# Altium PCB radio_v1.PcbDoc
Units mil, origin at the board's own origin, x right, y up, seen from the top; angles counter-clockwise.
Board outline 1155 x 550 mil, 2 copper layers (Top Layer, Bottom Layer); 45 components, 51 nets, 168 pads, 40 vias.
Unrouted connection lines stored in the file: 1.
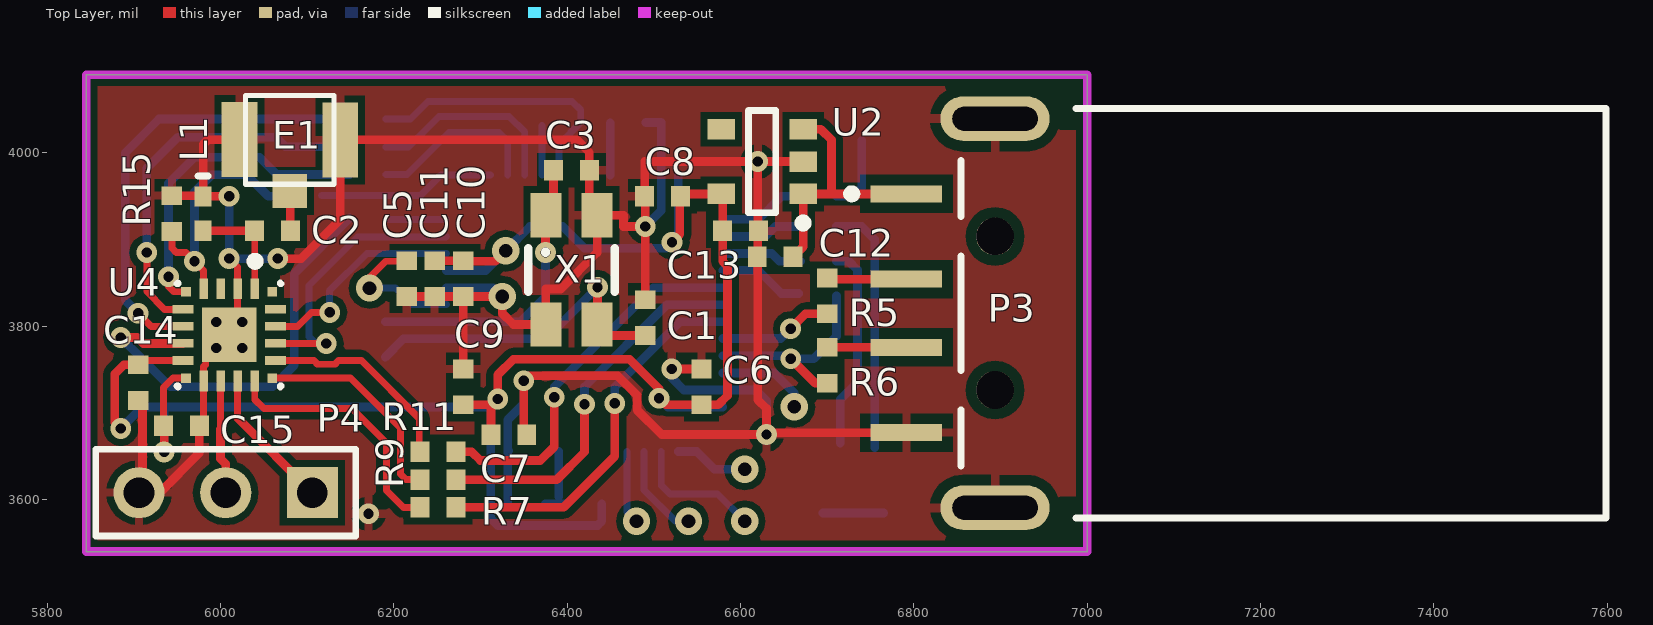
[diagram p0: Top Layer view]
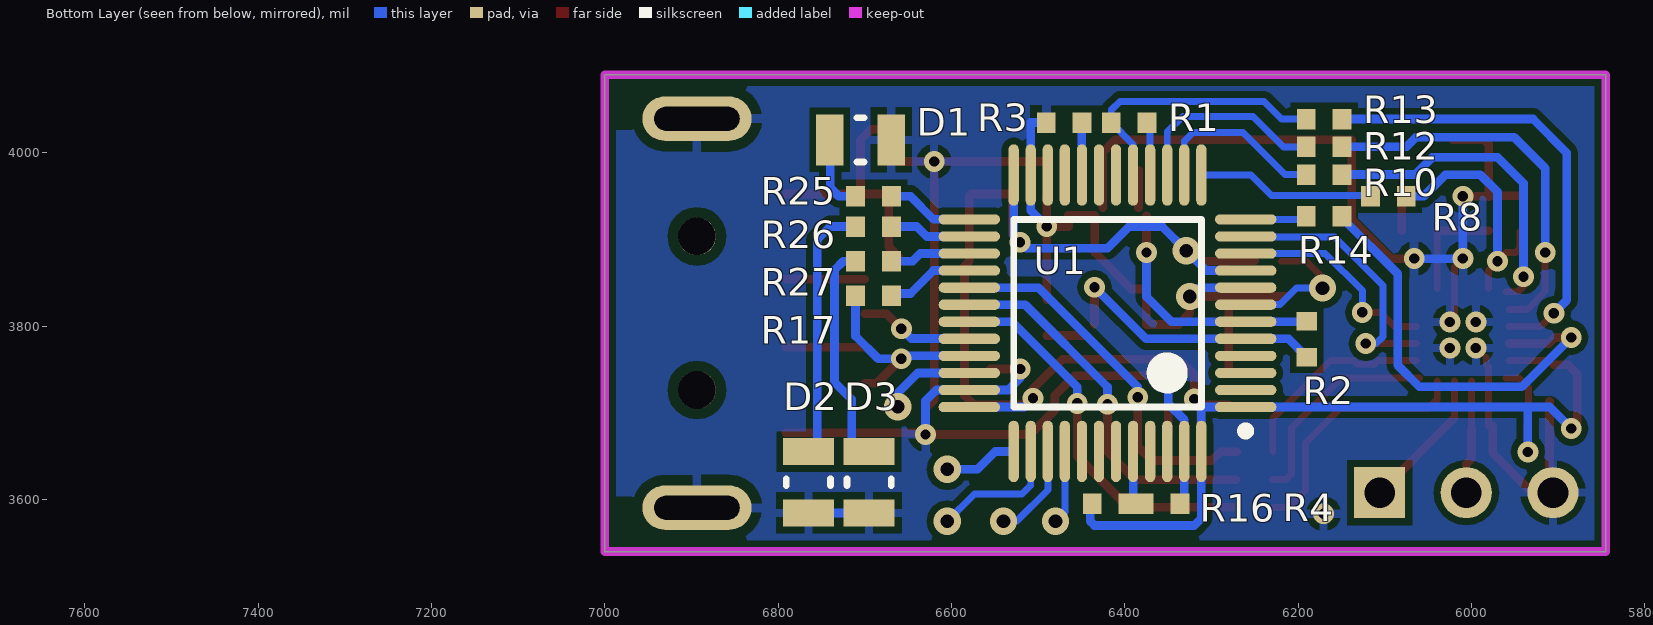
[diagram p1: Bottom Layer view, seen from below]

## Layer stack, top to bottom
Top Layer: signal copper 1.4
Dielectric: dielectric 12.6, FR-4, Dk 4.8
Bottom Layer: signal copper 1.4

## Board outline
5845,3540 5845,4090 7000,4090 7000,3540

## Design rules (kind name [scope] priority, off if disabled: settings)
Clearance ClearanceForUSB [InPolygon vs InComponent('P3')] p1: gap=12
Clearance [All] p2: gap=7.87
ComponentClearance [All] p1: gap=6 collisioncheckmode=3 verticalgap=6 showdistances=FALSE
HoleToHoleClearance [All] p1: gap=5.12 allowstackedmicrovias=TRUE
MinimumSolderMaskSliver [All] p1: minsoldermaskwidth=3.94
PolygonConnect [All] p1: connectstyle=Relief reliefconductorwidth=10 reliefentries=4 polygonreliefangle="90 Angle"
RoutingVias [All] p1: holewidth=11.81 width=23 viastyle="Through Hole" minholewidth=11.81 minwidth=23 maxholewidth=250 maxwidth=262
SilkToSilkClearance [All] p1: silktosilkclearance=6.2
SilkscreenOverComponentPads [All] p1: minsilkscreentomaskgap=6
SolderMaskExpansion [All] p1: expansion=3.94
Width [All] p1: maxlimit=10 minlimit=6 preferedwidth=8 minimp=50.000000 maximp=50.000000 favimp=50.000000
23 further rules are at their usual default settings.

## Classes and differential pairs
component class core: C1 C3 C5 C6 C7 C8 C9 C10 C11 D1 D2 D3 R1 R2 R3 R4 R16 R25 R26 R27 U1 X1
component class hole_field_direct: C2 C14 C15 E1 L1 P4 R7 R8 R9 R10 R11 R12 R13 R14 R15 U4
component class usb_connector: C12 C13 P3 R5 R6 R17 U2

## Components (designator, comment, footprint, x,y, rotation, side; value= is the part's Value field where it differs from the comment)
C1 "27pF" CHIP0402 6490,3810 r270 top
C2 "1nF" CHIP0402 6060,3910 r180 top
C3 "27pF" CHIP0402 6405,3980 r0 top
C5 "100nF" CHIP0402 6215,3855 r270 top
C6 "100nF" CHIP0402 6555,3730 r90 top
C7 "100nF" CHIP0402 6332.73,3675 r0 top
C8 "100nF" CHIP0402 6510,3950 r180 top
C9 "100nF" CHIP0402 6280,3730 r90 top
C10 "100nF" CHIP0402 6280,3855 r90 top
C11 "1uF" CHIP0402 6247,3855 r90 top
C12 "Cap" CHIP0402 6640,3880 r180 top
C13 "Cap" CHIP0402 6600,3910 r0 top
C14 "100nF" CHIP0402 5905,3735 r90 top
C15 "22nF" CHIP0402 5955,3685 r0 top
D1 "LED" LEDC2015X11L 6705,4015 r180 bottom
D2 "LED" LEDC2015X11L 6765,3620 r270 bottom
D3 "LED" LEDC2015X11L 6695,3620 r270 bottom
E1 "IPX_Antenna" IPX-M 6080,4015 r270 top
L1 "56nH" 0402-A 5980,3930 r270 top
P3 "1470695-2" 1470695A 7000,3815 r0 top locked
P4 "Header 3" HDR1X3 6106,3608 r180 top
R1 "47k" CHIP0402 6395,4035 r180 bottom
R2 "1M" CHIP0402 6190,3785 r90 bottom
R3 "47k" CHIP0402 6470,4035 r0 bottom
R4 "47k" CHIP0402 6357,3595 r180 bottom
R5 "22" CHIP0402 6700,3835 r270 top
R6 "22" CHIP0402 6700,3755 r270 top
R7 "600" CHIP0402 6251,3591 r180 top
R8 "2k" CHIP0402 6096,3950 r0 bottom
R9 "2k" CHIP0402 6251,3623 r180 top
R10 "2k" CHIP0402 6170,3975 r0 bottom
R11 "2k" CHIP0402 6251,3655 r180 top
R12 "2k" CHIP0402 6170,4007 r0 bottom
R13 "2k" CHIP0402 6170,4039 r0 bottom
R14 "2k" CHIP0402 6170,3927 r0 bottom
R15 "47k" CHIP0402 5944,3930 r90 top
R16 "47k" CHIP0402 6416.92,3595.01 r180 bottom
R17 "1.5K" CHIP0402 6690,3835 r0 bottom
R25 "56" CHIP0402 6690,3950 r180 bottom
R26 "56" CHIP0402 6690,3915 r0 bottom
R27 "56" CHIP0402 6690,3875 r0 bottom
U1 "STM32F103C8T6" LQFP48_N 6420,3815 r0 bottom locked
U2 "ADP120" SOT95P280X110-5L 6625,3990 r180 top locked
U4 "Si4705" QFN50P300X300X60-20N 6010,3790 r270 top
X1 "8 Mhz" SMD0635x11mm 6405,3865 r270 top locked

## Footprints (in the part's own frame and the unit in brackets; to place one, negate y for a bottom-side part, rotate by r counter-clockwise, add the part's x,y. Pads: shape width x height; smd on the part's side, far side on the other; paste and mask are expansions set on the pad)
0402-A [mm] "Chip Inductor, Body 1.0x0.5mm, IPC High Density"
  rect 0.6x0.5 smd: 1(-0.5,0) 2(0.5,0)
  silkscreen extent -1.1,-0.15 -1.1,0.15, body extent -0.55,-0.3 0.55,0.3, height 0.55
1470695A [mm] "Connector; USB1.1, Type A, SM; 4 Position; Right Angle"
  rect 2.1x0.5 smd: 1(-5.3,3.5) 2(-5.3,1) 3(-5.3,-1) 4(-5.3,-3.5)
  oval 3.2x1.3 hole 0.7 slot 2.5 at 0 deg: 5(-2.7,-5.7) 6(-2.7,5.7)
  round 1.1 hole 1.1 unplated paste+0 mask+0: MH1(-2.7,-2.25) MH2(-2.7,2.25)
  silkscreen extent -7.02,-6 15.2,6
CHIP0402 [mm] "Chip Resistor, 2-Leads, Body 1,0x0,5mm, IPC High Density"
  rect 0.55x0.6 smd: 1(0.525,0) 2(-0.525,0)
  body extent -0.5,-0.25 0.5,0.25, height 0.35
HDR1X3 [mm] "Connector; Header; 3 Position"
  rect 1.5x1.5 hole 0.9: 1(0,0)
  round 1.5 hole 0.9: 2(2.54,0) 3(5.08,0)
  silkscreen extent -1.27,-1.27 6.35,1.27
IPX-M [mm] "A microminiature RF coaxial connector"
  rect 1x1 smd: 1(1.5,0)
  rect 2.2x1.05 smd: 2(0,1.478) 3(-0.007,-1.478)
  silkscreen extent -1.3,-1.3 1.3,1.3, body extent -1.55,-1.36 1.55,1.36, height 1.34
LEDC2015X11L [mm] "Chip Led, 2-Leads, Body 2,0x1,5mm, IPC High Density"
  rect 0.8x1.5 smd: 1(-0.9,0) 2(0.9,0)
  silkscreen extent -0.1,-0.65 0.1,0.65, body extent -1,-0.75 1,0.75, height 1.1
LQFP48_N [mm] "Thin QFP, 48-Leads, Body 7x7mm, Pitch 0.5mm, IPC Medium Density"
  oval 1.8x0.3 smd: 1(-4.05,2.75) 2(-4.05,2.25) 3(-4.05,1.75) 4(-4.05,1.25) 5(-4.05,0.75) 6(-4.05,0.25) 7(-4.05,-0.25) 8(-4.05,-0.75) 9(-4.05,-1.25) 10(-4.05,-1.75) 11(-4.05,-2.25) 12(-4.05,-2.75) 25(4.05,-2.75) 26(4.05,-2.25) 27(4.05,-1.75) 28(4.05,-1.25) 29(4.05,-0.75) 30(4.05,-0.25) 31(4.05,0.25) 32(4.05,0.75) 33(4.05,1.25) 34(4.05,1.75) 35(4.05,2.25) 36(4.05,2.75)
  oval 0.3x1.8 smd: 13(-2.75,-4.05) 14(-2.25,-4.05) 15(-1.75,-4.05) 16(-1.25,-4.05) 17(-0.75,-4.05) 18(-0.25,-4.05) 19(0.25,-4.05) 20(0.75,-4.05) 21(1.25,-4.05) 22(1.75,-4.05) 23(2.25,-4.05) 24(2.75,-4.05) 37(2.75,4.05) 38(2.25,4.05) 39(1.75,4.05) 40(1.25,4.05) 41(0.75,4.05) 42(0.25,4.05) 43(-0.25,4.05) 44(-0.75,4.05) 45(-1.25,4.05) 46(-1.75,4.05) 47(-2.25,4.05) 48(-2.75,4.05)
  silkscreen extent -4.17,-2.75 2.75,3.57, body extent -3.5,-3.5 3.5,3.5, height 1.6
QFN50P300X300X60-20N [mm] "QFN, 20-Leads, Body 3,0x3,0mm (max), Pitch 0,50mm, IPC Medium Density"
  rect 1.6x1.6 smd: 0(0,0)
  rect 0.28x0.28 smd: 1(-1.265,1.265) 6(-1.265,-1.265) 11(1.265,-1.265) 16(1.265,1.265)
  rect 0.61x0.25 smd: 2(-1.355,0.75) 3(-1.355,0.25) 4(-1.355,-0.25) 5(-1.355,-0.75) 12(1.355,-0.75) 13(1.355,-0.25) 14(1.355,0.25) 15(1.355,0.75)
  rect 0.25x0.61 smd: 7(-0.75,-1.355) 8(-0.25,-1.355) 9(0.25,-1.355) 10(0.75,-1.355) 17(0.75,1.355) 18(0.25,1.355) 19(-0.25,1.355) 20(-0.75,1.355)
  silkscreen extent -2.28,-1.52 1.52,1.53, body extent -1.5,-1.5 1.5,1.5, height 0.6
SMD0635x11mm [mm] "SMD CRYSTAL UNITS 6*3.5*1.1mm"
  rect 1.3x0.9 smd: 1(-1.6,-0.75) 2(1.6,-0.75) 3(1.6,0.75) 4(-1.6,0.75)
  silkscreen extent -0.64,-1.27 0.64,1.27
SOT95P280X110-5L [mm] "SOT23, 5-Leads, Body 3,0x2,8mm (max), Pitch 0,95mm, IPC High Density"
  rect 0.8x0.6 smd: 1(-1.2,0.95) 2(-1.2,0) 3(-1.2,-0.95) 4(1.2,-0.95) 5(1.2,0.95)
  silkscreen extent -1.33,-1.5 0.4,1.92, body extent -0.85,-1.5 0.85,1.5, height 1.1

## Part data
C1 C2 C3 C5 C6 C7 C8 C9 C10 C11 C14 C15: library part Cap, "Capacitor"
C12 C13: "Capacitor"
D1 D2 D3: "Typical RED, GREEN, YELLOW, AMBER GaAs LED"
L1: library part Inductor, "Inductor"
P3: "USB 1.1, Right Angle, SMT, A Type, Plug, 4 Position, Natural"
P4: "Header, 3-Pin"
R1 R2 R3 R4 R5 R6 R7 R8 R9 R10 R11 R12 R13 R14 R15 R16 R17 R25 R26 R27: library part Res1, "Resistor"
U1: "STM32 ARM-based 32-bit MCU with 64 Kbytes Flash, 48-pin LQFP, Industrial Temperature"
X1: library part SMD4025-8.000, "Crystal"

## Via types
v1: diameter 24, hole 11.81, Top Layer to Bottom Layer, tented both sides, 28 vias
v2: diameter 31.5, hole 15.75, Top Layer to Bottom Layer, tented bottom, 8 vias
v3: diameter 24, hole 11.81, Top Layer to Bottom Layer, tented bottom, 4 vias

## Nets (pads, with @x,y where several pads share a name; then routed paths per layer and width w, separated by ;. In a path a pad name is that pad's centre, name@x,y a point inside that pad or via, vN(x,y) a via of type N, cw(c..) or ccw(c..) an arc to the next point about the centre after c; other vN are vias at no path point)
+3.3V: C6.2 C7.2 C8.2 C9.2 C10.1 C11.1 C13.2 C14.1 C15.2 R16.2 U1.1 U1.9 U1.24 U1.36 U1.48 U2.5 U4.10 U4.11 | length 2303.3
  Top Layer w8: C14.1@5909.8,3760.47 U4.10 ; C15.2 5934.33,3729.33 5945.2,3740.2 U4.11
  Top Layer w10: v1(5885,3682) 5878,3689 5878,3745 5888.67,3755.67 C14.1 ; v1(5935,3655) C15.2@5935,3684.33 ; C11.1@6250,3875.67 C10.1 ; C9.2 6313.33,3709.33 6312.06,3708.06 C7.2 ; C10.1@6280.67,3875 6317,3875 v2(6329,3887) ; v1(6320,3716) 6320,3744 6338,3762 6472,3762 6506,3728 v1(6506,3717) 6513.67,3709.33 C6.2 6574.33,3709.33 6585,3720 6585,3869.33 6579.33,3875 C13.2@6579.33,3905 ; v1(6521,3897) 6530,3906 6530,3949.33 6533.27,3952.6 U2.5 ; C13.2 U2.5@6579.33,3951.02
  Bottom Layer w10: v1(5885,3682) 5909.73,3706.73 5935,3706.73 ; v1(5935,3655) 5935,3706.73 ; U1.9 6306.21,3864.21 v2(6329,3887) 6357,3915 6395,3915 6420,3890 6514,3890 v1(6521,3897) 6528.27,3904.27 U1.24 ; v1(6320,3716) v1@6311.73,3707.73 ; R16.2@6440,3595 6440,3575 6435,3570 6320,3570 6311.73,3578.27 U1.48 v1@6311.73,3707.73 ; v1(6506,3717) 6516.27,3706.73 U1.36 ; 5935,3706.73 U1.1 6310.73,3706.73 v1@6311.73,3707.73
+5V: C12.2 P3.1 U2.1 U2.3 | length 296.9
  Top Layer w10: C12.2 6672.24,3891.57 U2.1 6791.14,3952.6 P3.1 ; U2.3 6692.6,4027.4 6705,4015 6705,3952.6
BOOT0: R4.2 R16.1 U1.44 | length 76
  Bottom Layer w10: R4.2@6375,3595 R16.1@6398.66,3595 ; R16.1@6390.47,3603.19 U1.44
BOOT1: R3.2 U1.20 | length 60.4
  Bottom Layer w10: U1.20 R3.2@6449.53,4034.8
C_AUX1: U1.45
C_AUX2: U1.46
C_AUX3: U1.21
C_AUX4: U1.22
C_RF_DCLK: R11.2 U1.29 | length 436
  Top Layer w10: R11.2@6270.67,3655 6290,3655 6300,3645 6369,3645 6385,3661 v1(6385,3718)
  Bottom Layer w10: v1(6385,3718) 6385,3730 6499.53,3844.53 U1.29
C_RF_DFS: R9.2 U1.30 | length 435.3
  Top Layer w10: R9.2 6388,3623 6420,3655 v1(6420,3710)
  Bottom Layer w10: v1(6420,3710) 6420,3730 6514.84,3824.84 U1.30
C_RF_DOUT: R7.2 U1.31 | length 444.3
  Top Layer w10: R7.2 6396,3591 6455,3650 v1(6455,3711)
  Bottom Layer w10: v1@6455,3710 6455,3730 6530.16,3805.16 U1.31
C_RF_GPO1: U1.10 U4.19 | length 246.7
  Top Layer w8: U4.19 6088.84,3799.84 6105,3816 v1(6126,3816)
  Bottom Layer w8: v1(6126,3816) 6126,3841 6168.9,3883.9 U1.10
C_RF_GPO2: U1.11 U4.18 | length 298.9
  Top Layer w8: U4.18 6110,3780.16
  Bottom Layer w8: v1@6110,3780 6102.13,3787.87 6102.13,3847.13 6158.19,3903.19 6260.16,3903.19 U1.11
  other v1: 6122,3780
C_RF_RCLK: R14.1 U1.12 | length 68.1
  Bottom Layer w8: R14.1@6192.4,3923.27 U1.12
C_RF_RESET: R8.1 U1.13 | length 204.8
  Bottom Layer w8: R8.1@6116.67,3951 6231,3951 6254.45,3974.45 U1.13
C_RF_SCLK: R12.1 U1.15 | length 231.9
  Bottom Layer w8: R12.1 6217,4007 6252,4042 6333,4042 6351.1,4023.9 U1.15
C_RF_SDIO: R1.2 R13.1 U1.17 | length 322.9
  Bottom Layer w8: R13.1 6219,4039 6239.33,4059.33 6405.67,4059.33 6415.67,4049.33 R1.2 6390.47,4009.8 U1.17
C_RF_SS: R10.1 U1.14 | length 204.1
  Bottom Layer w8: R10.1 6215,3975 6263.58,4023.58 6321.42,4023.58 6331.42,4013.58 U1.14
GND: C1.2 C3.1 C5.1 C6.1 C7.1 C8.1 C9.1 C10.2 C11.2 C12.1 C13.1 C14.2 C15.1 D1.2 D2.2 D3.2 E1.2 E1.3 L1.1 P3.4 P3.5 P3.6 P4.3 R3.1 R4.1 R15.1 U1.8 U1.23 U1.35 U1.47 U2.2 U4.0 U4.3 U4.4 U4.12 X1.2 X1.4 | length 3569.1
  Top Layer w8: P4.3@5905,3608 P4.3@5930,3608 ; C15.1@5980.47,3685 5980.47,3753.47 5983,3756 U4.0@5983,3764 ; v1(6010,3878) 6019.84,3868.16 U4.3 U4.0@6019.84,3799.84
  Top Layer w10: P4.3@5910,3608 C14.2@5910,3713.33 ; P4.3@5930,3608 5975.67,3653.67 C15.1 ; R15.1 L1.1@5979.02,3950.67 ; L1.1 5980,4010 5985.27,4015.27 E1.3 ; L1.1@5980.32,3950 v1(6010,3950) ; v1(6066,3878) 6093,3878 6138.19,3923.19 E1.2 6411,4015 6425.67,4000.33 C3.1 X1.4@6425.67,3936.85 ; C5.1 C11.2 C10.2 ; C9.1 C10.2 ; C7.1@6350,3675.67 v1(6350,3737) 6356,3743 6458.18,3743 6481,3720.18 6481,3703 6509,3675 v1(6630,3675) ; C8.1 6489.33,3990 U2.2 ; C1.2 v1(6490,3915) ; C8.1@6490,3949.33 v1(6490,3915) ; v1(6520.67,3750.67) C6.1 ; v1(6620,3990) 6620,3715 6630,3705 v1(6630,3675) ; v1@6630,3677.2 P3.4 ; v1@6632.2,3677.2 v1(6630,3675) ; C10.2 v2(6325,3834.33) 6325,3815 6337.99,3802.01 X1.2 6375.47,3843 6392.53,3843 6434.53,3885 X1.4 6465,3927.99 6465,3915 v1(6490,3915)
  Bottom Layer w10: v1(6010,3950) v1(6010,3878) v1(6066,3878) ; U1.8 6314.8,3844.53 v2(6325,3834.33) ; R4.1@6331.42,3595 U1.47 ; U1.47@6332.32,3656.46 U1.47 ; v1(6350,3737) 6350,3710.53 6331.42,3691.95 U1.47 ; v1(6490,3915) 6508.58,3933.58 U1.23 6508.58,4035 R3.1 ; v1@6520,3750 6520,3741 6534.58,3726.42 U1.35 6617.62,3726.42 6630,3714.04 v1(6630,3675) ; D3.2 D2.2
  other v1: 6170.67,3583.67
  other v3: 5995,3775 6025,3775 5995,3805 6025,3805
NetC2_1: C2.1 L1.2 U4.2 | length 125.8
  Top Layer w8: U4.2 C2.1@6039.53,3909.8
  Top Layer w10: L1.2@5980,3910 C2.1
NetC2_2: C2.2 E1.1 | length 45.3
  Top Layer w10: C2.2 E1.1@6080.67,3955.28
NetD1_1: D1.1 R25.2 | length 88
  Bottom Layer w10: R25.2 6730,3950 6740,3960 D1.1@6740,4014.57
NetD2_1: D2.1 R26.1 | length 290.5
  Bottom Layer w10: R26.1 6740,3915 6755,3900 D2.1@6755,3660
NetD3_1: D3.1 R27.1 | length 236.8
  Bottom Layer w10: R27.1 6725,3875 6735,3865 6735,3735.43 6715,3715.43 D3.1@6715,3665
NetP3_2: P3.2 R5.2 | length 91.3
  Top Layer w10: R5.2@6700,3854.37 P3.2
NetP3_3: P3.3 R6.2 | length 91.3
  Top Layer w10: R6.2@6700,3775.63 P3.3
NetP4_1: P4.1 U4.14 | length 183.3
  Top Layer w8: 6019.84,3694.16 U4.14
  Top Layer w10: 6019.84,3694.16 P4.1 P4.1@6087,3608
NetP4_2: P4.2 U4.13 | length 157.3
  Top Layer w8: 6000.16,3654.84 U4.13
  Top Layer w10: 6000,3681 6000,3647 6006,3641 P4.2
NetR1_1: R1.1 U1.16 | length 57
  Bottom Layer w8: U1.16 R1.1@6370.79,4031.46
NetR7_1: R7.1 U4.15 | length 295.8
  Top Layer w8: U4.15 6039.53,3715.47 6050,3705 6152,3705 6191.76,3665.24 6191.76,3610.24 6211,3591 R7.1
NetR9_1: R9.1 U4.16 | length 250.1
  Top Layer w8: U4.16 6149.8,3740.2 6207.63,3682.37 6207.63,3629.37 6214,3623 R9.1
NetR10_2: R10.2 U4.6 | length 371.8
  Top Layer w8: v1(5940,3857) 5940,3846 5946.2,3839.8 U4.6
  Bottom Layer w10: v1(5940,3857) 5940,3965 5970,3995 6045,3995 6065,3975 R10.2
NetR11_1: R11.1 U4.17 | length 235.9
  Top Layer w8: U4.17 6107.76,3760.47 6112.11,3756.13 6131.89,3756.13 6136.24,3760.47 6162.53,3760.47 6229.33,3693.67 R11.1@6229.33,3655
NetR12_2: R12.2 U4.7 | length 446.2
  Top Layer w8: v1(5915,3885) 5915,3840 5935.47,3819.53 U4.7
  Bottom Layer w10: v1(5915,3885) 5915,3982.43 5950.57,4018 6064,4018 6075,4007 R12.2
NetR13_2: R13.2 U4.8 | length 524.5
  Top Layer w8: v1(5905,3815) 5920.16,3799.84 U4.8
  Bottom Layer w10: v1(5905,3815) 5890,3830 5890,3999.85 5929.15,4039 R13.2
NetR14_2: R14.2 U4.9 | length 505.1
  Top Layer w10: v1(5885,3787) 5904,3787 5910.84,3780.16 U4.9
  Bottom Layer w10: v1(5885,3787) 5942,3730 6060,3730 6085,3755 6085,3860.67 R14.2@6149.33,3925
NetR25_1: R25.1 U1.25 | length 101
  Bottom Layer w10: U1.25 6620.64,3923.27 6647.37,3950 R25.1
NetR26_2: R26.2 U1.26 | length 94.6
  Bottom Layer w10: U1.26 6628.58,3903.58 6640,3915 R26.2
NetR27_2: R27.2 U1.27 | length 93.6
  Bottom Layer w10: U1.27 6636.1,3883.9 6645,3875 R27.2
OSC_IN: C1.1 R2.2 U1.5 X1.3 | length 363.7
  Top Layer w10: X1.3@6435,3802.48 v1(6435,3845) ; X1.3@6447.2,3789.33 C1.1
  Bottom Layer w10: R2.2 6211.14,3785.47 U1.5 6375.47,3785.47 v1(6435,3845)
OSC_OUT: C3.2 R2.1 U1.6 X1.1 | length 333.6
  Top Layer w10: v1(6375,3885) X1.1@6375,3927.52 ; X1.1@6384.33,3936.85 C3.2
  Bottom Layer w10: R2.1@6190,3805.16 U1.6 6346.16,3805.16 6375,3834 v1(6375,3885)
RF_RESET: R8.2 R15.2 U4.5 | length 291.4
  Top Layer w8: R15.2 5944,3890 5949,3885 5960,3885 v1(5970,3875) 5980.47,3864.53 U4.5
  Bottom Layer w10: v1(5970,3875) 5970,3955 5989.87,3974.87 6030.13,3974.87 6055,3950 R8.2
RST: C5.2 U1.7 | length 163.7
  Top Layer w8: v2(6172,3844) 6172,3856 6191,3875 C5.2@6219.33,3875
  Bottom Layer w8: v2(6172,3844) 6202,3844 6221.16,3824.84 U1.7
TCK: U1.37 | length 85.2
  Bottom Layer w10: U1.37 6549.45,3655.55 6570,3635 v2(6605,3635)
TDI: U1.38 | length 152.7
  Bottom Layer w8: U1.38 6508.58,3616.42 6518.58,3606.42 6573.58,3606.42 v2(6605,3575)
TDO: U1.39 | length 110.5
  Bottom Layer w8: U1.39 6488.9,3611.1 6525,3575 v2(6540,3575)
TMS: U1.34 | length 108.1
  Bottom Layer w10: U1.34 6638.9,3746.1 6662,3723 v2(6662,3707)
TRST: U1.40 | length 85
  Bottom Layer w8: U1.40 6469.21,3585.79 v2(6480,3575)
USB_D_N: R5.1 U1.32 | length 132.4
  Top Layer w10: v1(6657.83,3797.17) 6675,3814.33 R5.1
  Bottom Layer w10: U1.32@6579.45,3785.79 6646.46,3785.79 v1(6657.83,3797.17)
USB_D_P: R6.1 R17.1 U1.33 | length 243.4
  Top Layer w10: v1(6657.94,3762.55) 6686.16,3734.33 R6.1
  Bottom Layer w10: U1.33 6654.7,3765.79 v1(6657.94,3762.55) 6684.44,3762.55 6710.67,3788.78 R17.1
USB_POWER_ON: R17.2 U1.28 | length 98.6
  Bottom Layer w10: U1.28 6620.79,3864.21 6647.17,3837.83 R17.2@6667.17,3837.83
pads on no net: P3.MH1 P3.MH2 U1.2 U1.3 U1.4 U1.18 U1.19 U1.41 U1.42 U1.43 U2.4 U4.1 U4.20

## Polygon pours and split planes (outlines as drawn)
GND on Top Layer "Top Layer-GND" (solid, pour order 2): 5845,4090 5845,3540 7000,3540 7000,4090
GND on Bottom Layer "Top Layer-GND" (solid, pour order 4): 5845,4090 7000,4090 7000,3540 5845,3540

## Keep-outs
Keep-Out Layer:
  the board outline again, w10

## Dimensions
7000,3540 to 6893.7,3590.59 on Mechanical 2
7000,4090 to 6893.7,4039.41 on Mechanical 2
5845,3540 to 7000,3540 on Mechanical 2
5845,4090 to 5845,3540 on Mechanical 2